# Altium PCB Inductive_measurement.PcbDoc
Units mm, origin at the board's own origin, x right, y up, seen from the top; angles counter-clockwise.
Board outline 60 x 140 mm, 4 copper layers (Top Layer, GND, Supply, Bottom Layer), stack 0.778 mm thick; 140 components, 66 nets, 478 pads, 62 vias.
Unrouted connection lines stored in the file: 122.
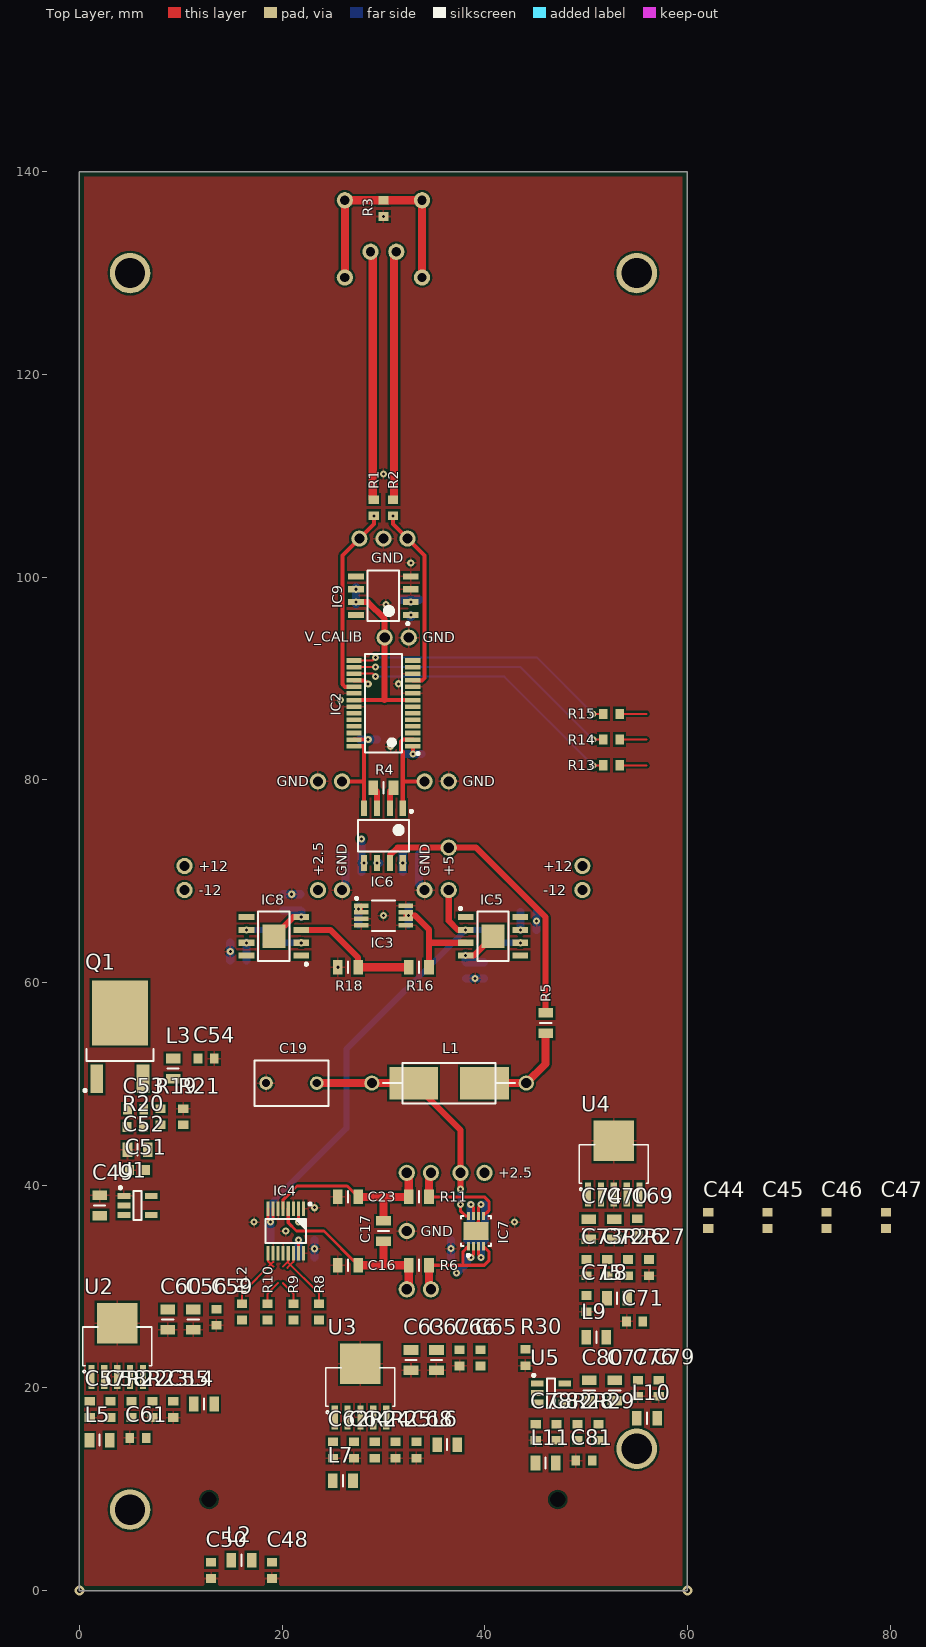
[diagram p0: Top Layer view]
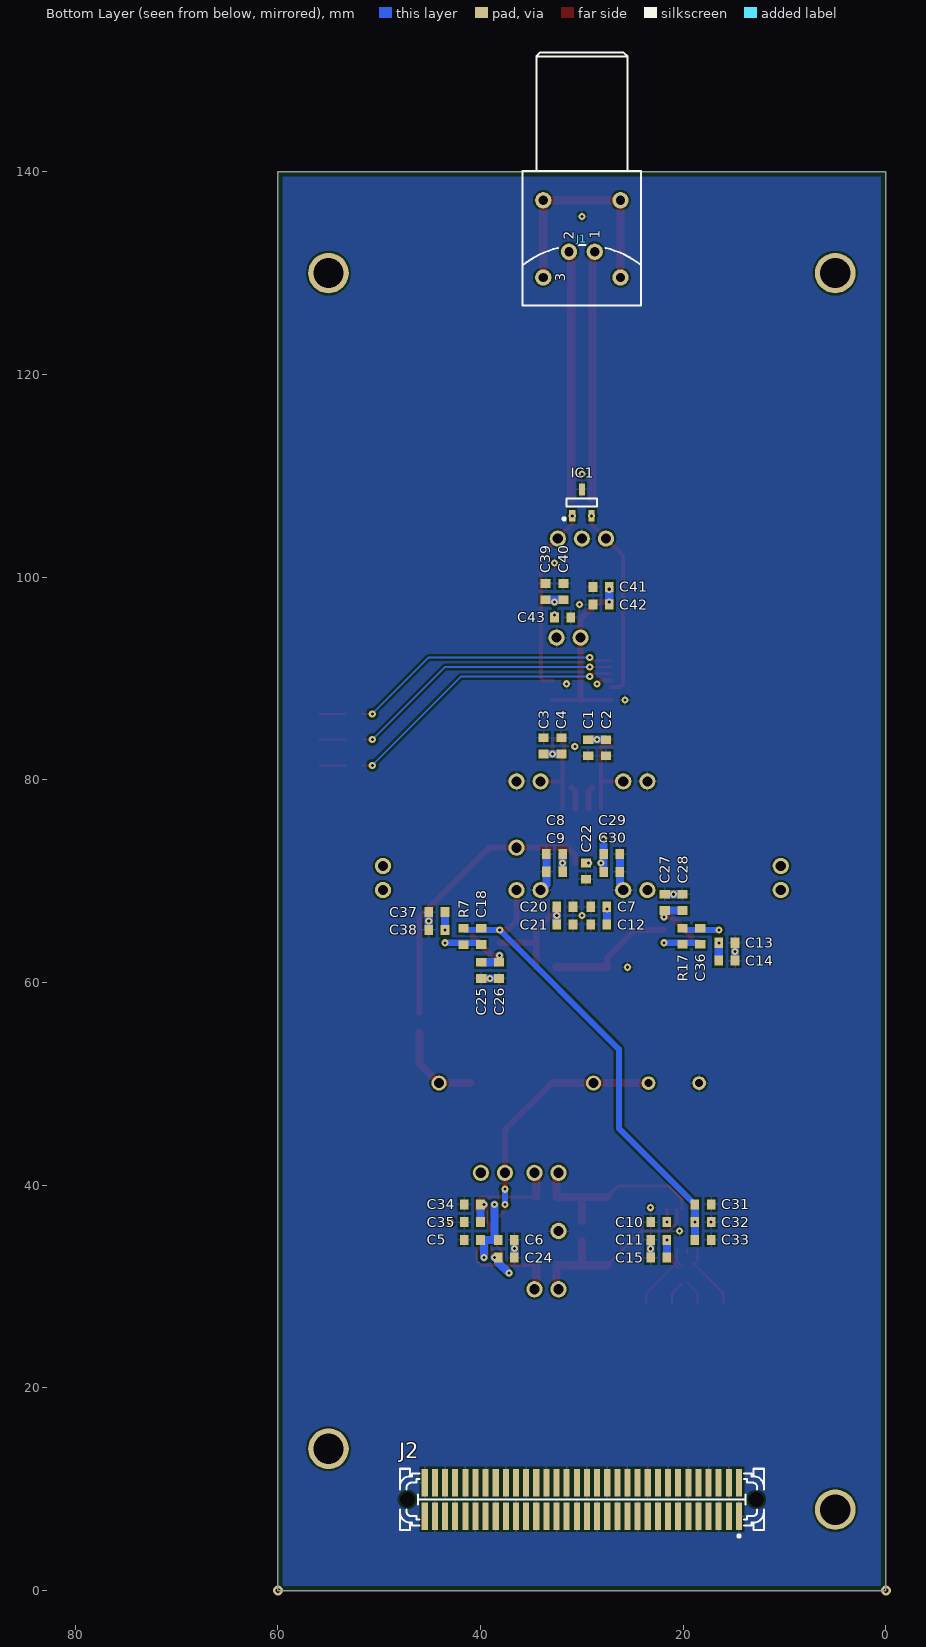
[diagram p1: Bottom Layer view, seen from below]
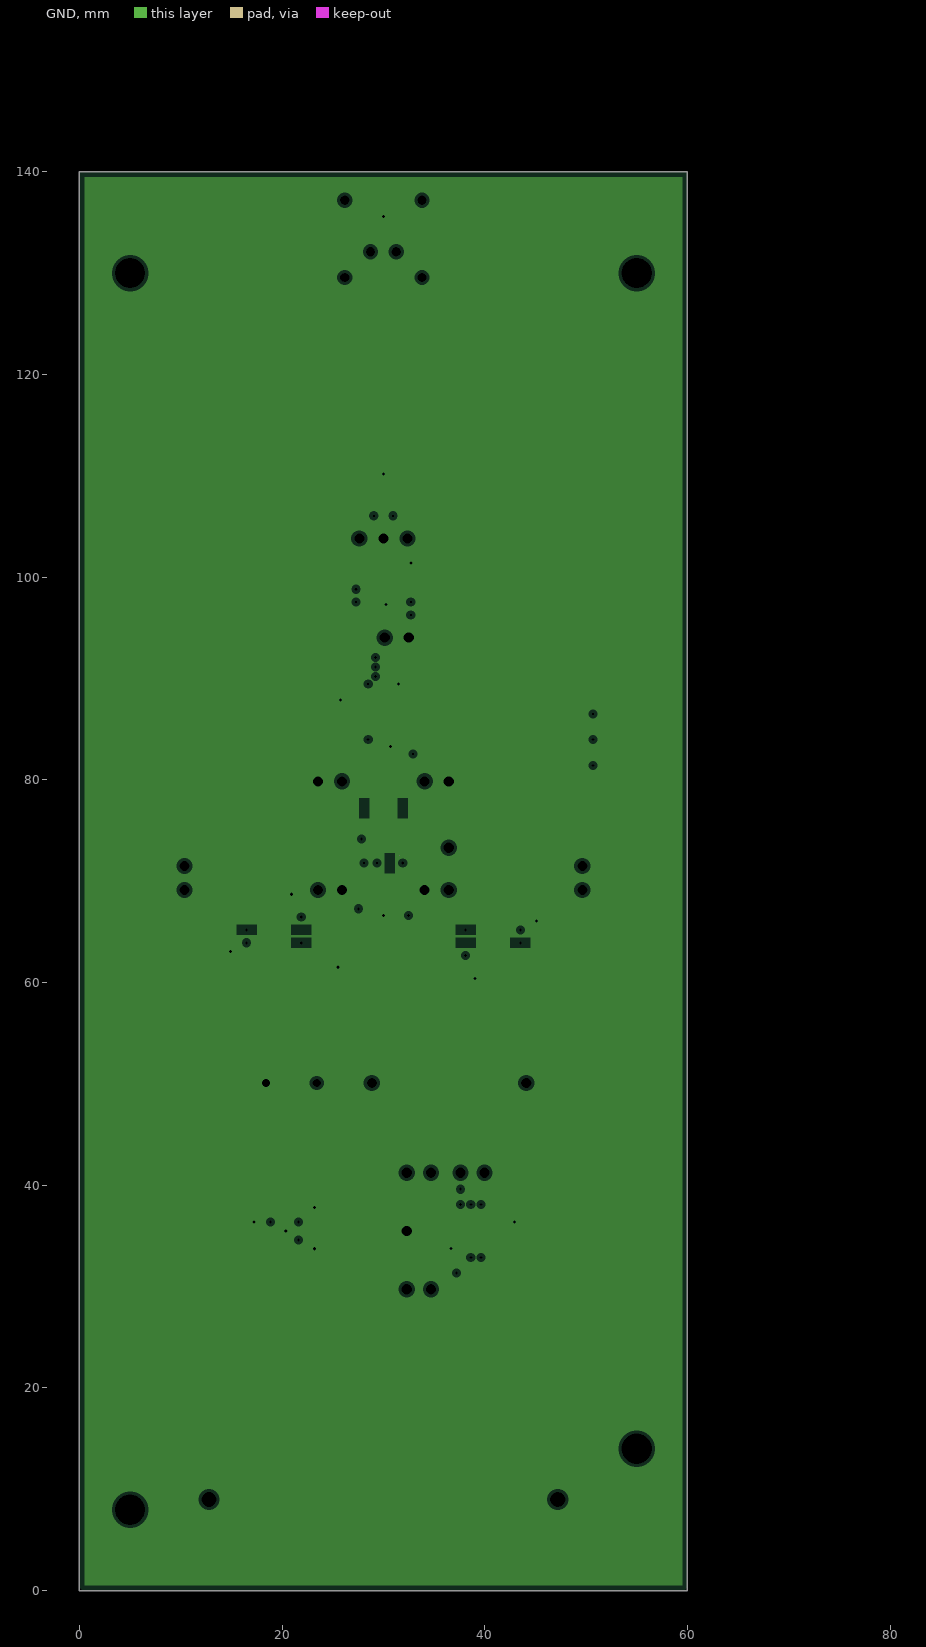
[diagram p2: GND, clearances drawn from the general rule]
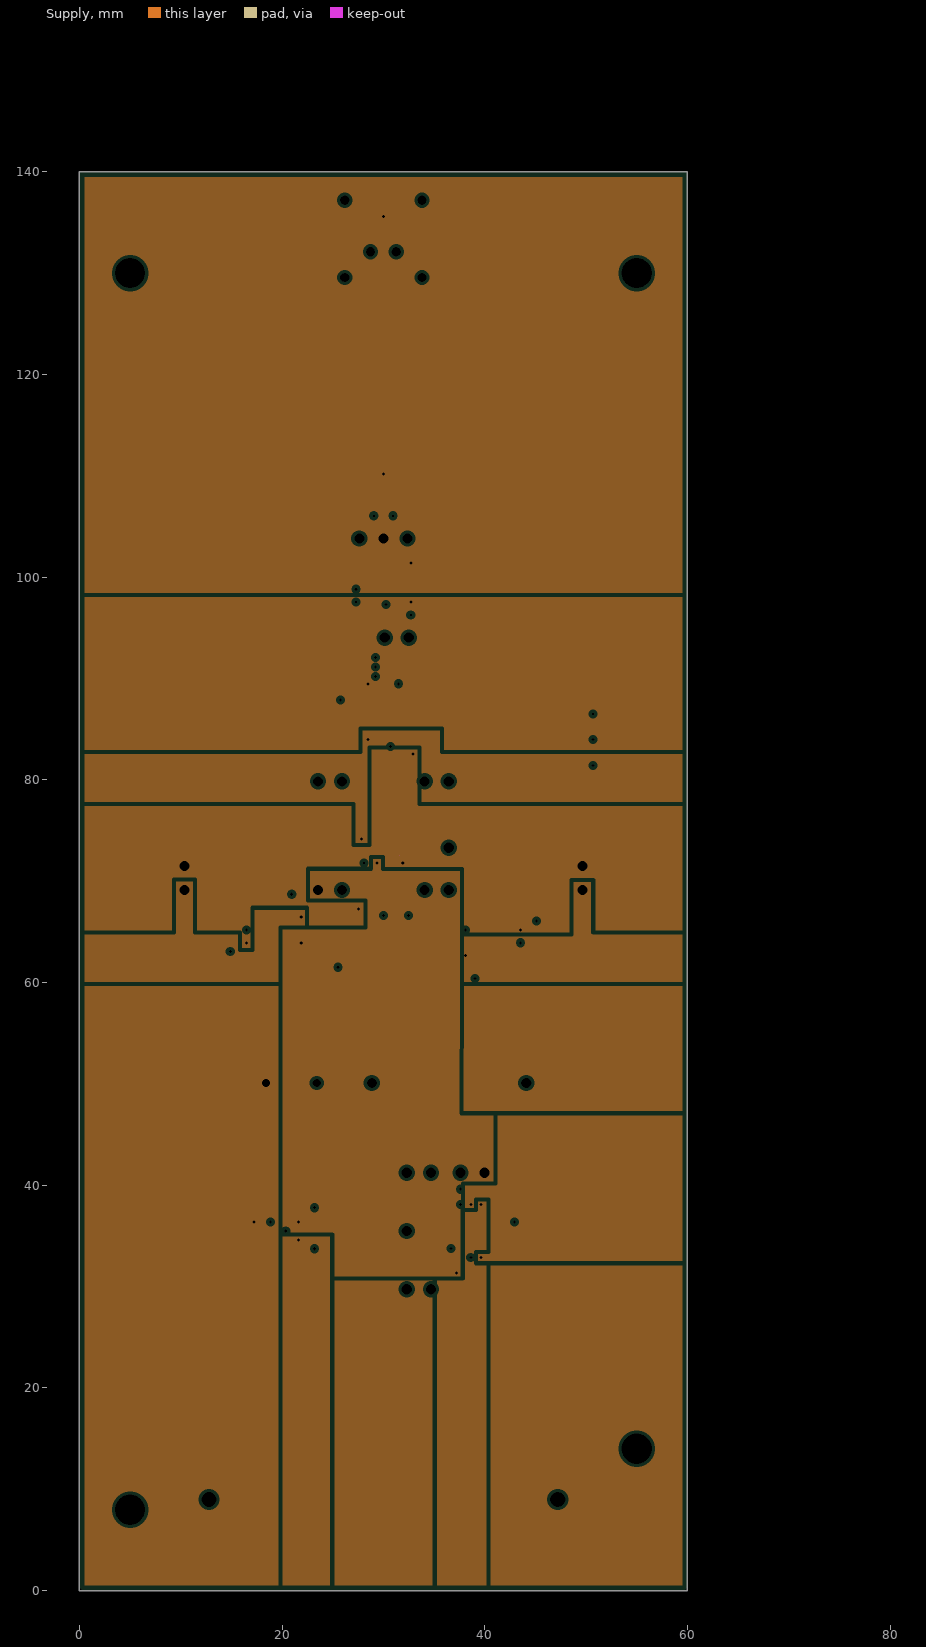
[diagram p3: Supply, clearances drawn from the general rule]

## Layer stack, top to bottom
Top Solder: solder mask 0.0102, Solder Resist, Dk 3.5
Top Layer: signal copper 0.0356
Dielectric 1: core 0.254, FR-4, Dk 4.2
GND: plane copper 0.036, net GND
Dielectric 2: prepreg 0.127, Dk 4.2
Supply: plane copper 0.036, net (Multiple Nets)
Dielectric 3: core 0.254, Dk 4.2
Bottom Layer: signal copper 0.0356
Bottom Solder: solder mask 0.0102, Solder Resist, Dk 3.5

## Board outline
0,0 60,0 60,140 0,140
cut-out: 31.6,72.55

## Design rules (kind name [scope] priority, off if disabled: settings)
Clearance [All] p1: gap=0.2 ignorepadtopadclearanceinfootprint=FALSE except(0: Arc-Hole Track-Hole SMDPad-Hole THPad-Hole Via-Hole Fill-Hole Poly-Hole Region-Hole Text-Hole; 0.25: Arc-Via Track-Via SMDPad-Via THPad-Via Via-Via Via-Fill Via-Poly Via-Region Via-Text)
HoleToHoleClearance [All] p1: gap=0.25 allowstackedmicrovias=TRUE
MinimumSolderMaskSliver [All] p1: minsoldermaskwidth=0.2
PlaneClearance [All] p1: clearance=0.3
PlaneConnect [All] p1: planeconnectstyle=Direct reliefexpansion=0.508 reliefentries=4 reliefconductorwidth=0.254 reliefairgap=0.254
PolygonConnect [All] p1: connectstyle=Relief reliefconductorwidth=0.2 reliefentries=4 polygonreliefangle="90 Angle" airgapwidth=0.2
RoutingVias [All] p1: holewidth=0.3 width=0.7 viastyle="Through Hole" minholewidth=0.3 minwidth=0.7 maxholewidth=1 maxwidth=1.6
SilkToSilkClearance [All] p1: silktosilkclearance=0.2
SilkToSolderMaskClearance [IsPad] p1: minsilkscreentomaskgap=0.2 clearancetoexposedcopper=TRUE
SolderMaskExpansion [All] p1: expansion=0.102
Width [All] p1: maxlimit=0.9 minlimit=0.2 preferedwidth=0.2
24 further rules are at their usual default settings.

## Classes and differential pairs
component class Int_LDOs: C48 C49 C50 C51 C52 C53 C54 C55 C56 C57 C58 C59 C60 C61 C62 C63 C64 C65 C66 C67 C68 C69 C70 C71 C72 C73 C74 C75 C76 C77 C78 C79 C80 C81 C82 L2 L3 L4 L5 L6 L7 L8 L9 L10 L11 Q1 R19 R20 R21 R22 R23 R24 R25 R26 R27 R28 R29 R30 U1 U2 U3 U4 U5
component class Inductive_measurement: C1 C2 C3 C4 C5 C6 C7 C8 C9 C10 C11 C12 C13 C14 C15 C16 C17 C18 C19 C20 C21 C22 C23 C24 C25 C26 C27 C28 C29 C30 C31 C32 C33 C34 C35 C36 C37 C38 C39 C40 C41 C42 C43 C44 C45 C46 C47 IC1 IC2 IC3 IC4 IC5 IC6 IC7 IC8 IC9 J1 J2 L1 R1 R2 R3 R4 R5 R6 R7 R8 R9 R10 R11 R12 R13 R14 R15 R16 R17 R18 R20

## Components (designator, comment, footprint, x,y, rotation, side; value= is the part's Value field where it differs from the comment)
C1 "100n" 0603 29.375,83.17 r90 bottom
C2 "10u" 0603 27.625,83.17 r90 bottom
C3 "100n" 0603 33.775,83.345 r270 bottom
C4 "10u" 0603 32.025,83.345 r270 bottom
C5 "100n" 0603 40.808,34.605 r180 bottom
C6 "10u" 0603 37.457,34.605 r180 bottom
C7 "100n" 0603 28.33,67.48 r0 bottom
C8 "100n" 0603 32.705,72.675 r180 bottom
C9 "10u" 0603 32.705,70.925 r0 bottom
C10 "100n" 0603 22.411,36.355 r180 bottom
C11 "100n" 0603 22.411,34.605 r0 bottom
C12 "10u" 0603 28.33,65.731 r0 bottom
C13 "100n" 0603 15.691,63.92 r0 bottom
C14 "10u" 0603 15.691,62.17 r180 bottom
C15 "10u" 0603 22.411,32.855 r0 bottom
C16 "3.9n" 0805 26.5,32.105 r180 top
C17 "3.9n" 0805 30,35.48 r270 top
C18 "=Value" 0603 39.925,64.55 r270 bottom
C19 "1u" CAPR500-450X730X950 20.925,50.075 r0 top
C20 "100n" 0603 31.68,67.48 r0 bottom
C21 "=Value" 0603 31.68,65.731 r0 bottom
C22 "100n" 0603 29.605,70.99 r90 bottom
C23 "3.9n" 0805 26.5,38.855 r0 top
C24 "100n" 0603 37.457,32.855 r0 bottom
C25 "100n" 0603 39.925,61.2 r90 bottom
C26 "10u" 0603 38.175,61.2 r90 bottom
C27 "100n" 0603 21.826,67.91 r270 bottom
C28 "10u" 0603 20.076,67.91 r270 bottom
C29 "100n" 0603 27.055,72.665 r0 bottom
C30 "10u" 0603 27.055,70.915 r180 bottom
C31 "22u" 0603 18.048,38.105 r0 bottom
C32 "22u" 0603 18.048,36.355 r0 bottom
C33 "22u" 0603 18.048,34.605 r0 bottom
C34 "100n" 0603 40.808,38.105 r180 bottom
C35 "10u" 0603 40.808,36.355 r0 bottom
C36 "=Value" 0603 18.326,64.56 r270 bottom
C37 "100n" 0603 44.31,66.94 r0 bottom
C38 "10u" 0603 44.31,65.19 r180 bottom
C39 "100n" 0603 33.574,98.57 r90 bottom
C40 "10u" 0603 31.824,98.57 r90 bottom
C41 "100n" 0603 28.1,99.04 r180 bottom
C42 "10u" 0603 28.1,97.29 r180 bottom
C43 "100n" 0603 31.9,96.02 r0 bottom
C44 "100n" 0603 62.054,36.528 r90 top
C45 "100n" 0603 67.905,36.528 r90 top
C46 "100n" 0603 73.73,36.528 r90 top
C47 "100n" 0603 79.58,36.528 r90 top
C48 "100n" 0603 19,2 r90 top
C49 "2u2" 0805 2,38 r270 top
C50 "100n" 0603 13,2 r90 top
C51 "100n" 0603 5.75,41.5 r0 top
C52 "2u2" 0805 5.75,43.5 r0 top
C53 "100n" 0603 5.55,47.5 r0 top
C54 "100n" 0603 12.5,52.5 r180 top
C55 "100n" 0603 9.261,17.88 r90 top
C56 "2u2" 0805 11.23,26.742 r90 top
C57 "100n" 0603 1.029,17.88 r90 top
C58 "10n" 0603 3.087,17.88 r90 top
C59 "100n" 0603 13.513,26.967 r90 top
C60 "2u2" 0805 8.722,26.742 r90 top
C61 "100n" 0603 5.787,15.072 r0 top
C62 "100n" 0603 25.029,13.88 r90 top
C63 "2u2" 0805 32.722,22.742 r90 top
C64 "100n" 0603 27.087,13.88 r90 top
C65 "10n" 0603 39.571,22.967 r90 top
C66 "100n" 0603 37.513,22.967 r90 top
C67 "2u2" 0805 35.23,22.742 r90 top
C68 "100n" 0603 33.261,13.88 r90 top
C69 "100n" 0603 55.045,35.88 r90 top
C70 "2u2" 0805 52.762,35.655 r90 top
C71 "100n" 0603 54.787,26.556 r0 top
C72 "10n" 0603 52.087,31.872 r90 top
C73 "100n" 0603 50.029,31.872 r90 top
C74 "2u2" 0805 50.254,35.655 r90 top
C75 "100n" 0603 50.029,28.314 r90 top
C76 "100n" 0603 55.103,19.967 r90 top
C77 "2u2" 0805 52.82,19.742 r90 top
C78 "100n" 0603 45.029,15.634 r90 top
C79 "100n" 0603 57.161,19.967 r90 top
C80 "2u2" 0805 50.312,19.742 r90 top
C81 "100n" 0603 49.787,12.826 r0 top
C82 "100n" 0603 47.087,15.634 r90 top
IC1 "PESD12VL2BT" SOT95P280X115-3N 30,107.35 r90 bottom
IC2 "ADG1207" SOP65P640X120-28N 30,87.545 r180 top
IC3 "LTC6655B-5" SOP65P488X110-8N 30,66.605 r0 top
IC4 "LTC2379-18" SOP50P490X110-16N 20.361,35.48 r270 top
IC5 "ADA4898-1" SOIC127P600X175-9N-S229 40.81,64.555 r0 top
IC6 "AD8429" SOIC127P600X175-8N 30,74.49 r270 top
IC7 "LT6350" SON50P300X300X80-9N-R175X248 39.132,35.48 r90 top
IC8 "ADA4898-1" SOIC127P600X175-9N-S229 19.191,64.555 r180 top
IC9 "MAX6126" SOIC127P600X175-8N 30,98.165 r180 top
J1 "=Family" LEMO_EPG.0B.302.HLN 30,132.1 r90 bottom
J2 "PCI_PMC" TYCO_120527-1 12.8,9 r0 bottom locked
L1 "100u" INDAD1524-920X400 36.475,50.075 r180 top
L2 "BLM211k" 0805 16,3 r180 top value=1k
L3 "BLM211k" 0805 9.25,51.5 r90 top value=1k
L4 "BLM211k" 0805 12.294,18.405 r0 top value=1k
L5 "BLM211k" 0805 2.004,14.847 r0 top value=1k
L6 "BLM211k" 0805 36.294,14.405 r0 top value=1k
L7 "BLM211k" 0805 26.004,10.847 r0 top value=1k
L8 "BLM211k" 0805 53.062,28.839 r0 top value=1k
L9 "BLM211k" 0805 51,25 r0 top value=1k
L10 "BLM211k" 0805 56,17 r0 top value=1k
L11 "BLM211k" 0805 46.004,12.601 r0 top value=1k
Q1 "MJD2955" DPAK 4,54.65 r90 top
R1 "=Value" 0603 29.05,106.85 r90 top
R2 "=Value" 0603 30.95,106.85 r90 top
R3 "1M" 0603 30,136.38 r90 top
R4 "DNP" 0805 30,79.215 r0 top
R5 "100" 0805 46.01,56 r270 top
R6 "22" 0805 33.5,32.105 r180 top
R7 "22" 0603 41.668,64.543 r90 bottom
R8 "22" 0603 23.65,27.5 r270 top
R9 "22" 0603 21.11,27.5 r270 top
R10 "22" 0603 18.57,27.5 r270 top
R11 "22" 0805 33.5,38.855 r180 top
R12 "22" 0603 16.03,27.5 r270 top
R13 "22" 0603 52.5,81.43 r180 top
R14 "22" 0603 52.5,83.97 r180 top
R15 "22" 0603 52.5,86.51 r180 top
R16 "1k" 0805 33.501,61.505 r0 top
R17 "22" 0603 20.076,64.56 r270 bottom
R18 "1k" 0805 26.501,61.505 r0 top
R19 "18k" 0603 8,46.75 r90 top
R20 "47k" 0603 5.5,45.75 r180 top
R21 "1k6" 0603 10.25,46.75 r270 top
R22 "16k" 0603 5.145,17.88 r90 top
R23 "1k5" 0603 7.203,17.88 r90 top
R24 "4k7" 0603 29.145,13.88 r90 top
R25 "1k3" 0603 31.203,13.88 r90 top
R26 "2k" 0603 54.145,31.872 r90 top
R27 "1k3" 0603 56.203,31.872 r90 top
R28 "8k2" 0603 49.145,15.634 r90 top
R29 "16k" 0603 51.203,15.634 r90 top
R30 "12k" 0603 44,23 r90 top
U1 "ADP7182ADJ" SOT23-5 5.75,38 r0 top value=ADJ
U2 "REG104GAADJ" SOT223_6-127 3.734,24.104 r0 top value=ADJ
U3 "REG104GAADJ" SOT223_6-127 27.734,20.104 r0 top value=ADJ
U4 "REG104GAADJ" SOT223_6-127 52.734,42.104 r0 top value=ADJ
U5 "ADP7182ADJ" SOT23-5 46.529,19.492 r0 top value=ADJ

## Footprints (in the part's own frame and the unit in brackets; to place one, negate y for a bottom-side part, rotate by r counter-clockwise, add the part's x,y. Pads: shape width x height; smd on the part's side, far side on the other; paste and mask are expansions set on the pad)
0603 [mm] "Chip Resistor, EIA 0603, Metric 1608, Body 1.6x0.8mm, IPC Medium Density"
  rect 0.85x1 smd: 1(-0.8,0) 2(0.8,0)
  body extent -0.87,-0.47 0.88,0.48, height 0.6
0805 [mm] "Chip Resistor, EIA 0805, Metric 2012, Body 2.0x1.25mm, IPC Medium Density"
  rect 0.95x1.45 smd: 1(-1,0) 2(1,0)
  silkscreen extent 0,-0.55 0,0.55, body extent -1.1,-0.67 1.1,0.68, height 0.5
CAPR500-450X730X950 [mm] "Capacitor Radial, Pin spacing 5.0mm - Body With 4.5mm X Body Length 7.3mm X Body Height 9.5mm"
  round 1.35 hole 0.8: 1(-2.5,0) 2(2.5,0)
  silkscreen extent -3.65,-2.25 3.65,2.25, body extent -3.65,-2.25 3.65,2.25, height 9.5
DPAK [mm] "TO-252AA DPAK TO, 2.28mm pitch; 2 pin,9.90mm L X 6.56mm W X 2.38mm H body, IPC Medium Density"
  rect 2.8x1.25 smd: 1(-4.15,2.28) 2(-4.15,-2.28)
  rect 6.4x5.55 smd: 3(2.35,0)
  silkscreen extent -5.42,-3.3 -1.2,3.57, body extent -4.99,-3.27 4.95,3.27, height 2.28
INDAD1524-920X400 [mm] "Inductor, Axial Diameter, Pad spacing 15.24 mm - Body Lengh 9.2mm X Body Diameter 4mm"
  round 1.5 hole 1: 1(-7.62,0) 2(7.62,0)
  rect 4.8x3.2 smd: 1(-3.5,0) 2(3.5,0)
  silkscreen extent -6.5,-2 6.5,2, body extent -8.02,-2 8.02,2, height 4
LEMO_EPG.0B.302.HLN [mm] "Elbow Receptacle (90°) With 2 Female Contacts and Key (G) For PCB"
  round 1.6 hole 0.9: 1(0,-1.27) 2(0,1.27) 3(-2.54,-3.81) 3(-2.54,3.81) 3(5.08,-3.81) 3(5.08,3.81)
  silkscreen extent -5.32,-5.85 19.68,5.85, body extent -5.32,-5.85 19.68,5.85, height 12.7
SOIC127P600X175-8N [mm] "SOIC 8, Pitch 1.27mm - Body 4x5mm, IPC Medium Density"
  rect 1.55x0.6 smd: 1(-2.7,1.905) 2(-2.7,0.635) 3(-2.7,-0.635) 4(-2.7,-1.905) 5(2.7,-1.905) 6(2.7,-0.635) 7(2.7,0.635) 8(2.7,1.905)
  silkscreen extent -2.52,-2.5 1.55,2.88, body extent -3.1,-2.5 3.1,2.5, height 1.75
SOIC127P600X175-9N-S229 [mm] "SOIC 8, 1.27mm Pitch; 8 pin, 3.90mm W X 4.90mm L X 1.75mm H body, (w/thermal tab 2.29mm X 2.29mm), IPC Medium Density"
  rect 1.55x0.6 smd: 1(-2.7,1.905) 2(-2.7,0.635) 3(-2.7,-0.635) 4(-2.7,-1.905) 5(2.7,-1.905) 6(2.7,-0.635) 7(2.7,0.635) 8(2.7,1.905)
  rect 2.29x2.29 smd: 9(0,0)
  silkscreen extent -3.32,-2.45 1.55,2.87, body extent -3.1,-2.5 3.1,2.5, height 1.75
SON50P300X300X80-9N-R175X248 [mm] "SON, (DFN) 0.50mm,pitch; 8 pin,3.00mm W X 3.00mm L X 0.80mm H body (w/thermal tab 1.75 X2.48mm), IPC Medium Density"
  rect 0.8x0.3 smd: 1(-1.5,0.75) 2(-1.5,0.25) 3(-1.5,-0.25) 4(-1.5,-0.75) 5(1.5,-0.75) 6(1.5,-0.25) 7(1.5,0.25) 8(1.5,0.75)
  rect 1.75x2.45 smd: 9(0,0)
  silkscreen extent -2.52,-1.5 1.5,1.5, body extent -1.55,-1.55 1.55,1.55, height 0.8
SOP50P490X110-16N [mm] "SOP, 0.50mm Pitch; 16 Pin, 3.00mm W X 4.039mm L X 1.10mm H Body, IPC Medium Density"
  rect 1.4x0.3 smd: 1(-2.2,1.75) 2(-2.2,1.25) 3(-2.2,0.75) 4(-2.2,0.25) 5(-2.2,-0.25) 6(-2.2,-0.75) 7(-2.2,-1.25) 8(-2.2,-1.75) 9(2.2,-1.75) 10(2.2,-1.25) 11(2.2,-0.75) 12(2.2,-0.25) 13(2.2,0.25) 14(2.2,0.75) 15(2.2,1.25) 16(2.2,1.75)
  silkscreen extent -2.77,-2 1.17,2.53, body extent -2.47,-2.07 2.47,2.07, height 1.1
SOP65P488X110-8N [mm] "SOP, 8-Leads, Body 3x3mm (max), Pitch 0.65mm, IPC Medium Density"
  rect 1.45x0.45 smd: 1(-2.2,0.975) 2(-2.2,0.325) 3(-2.2,-0.325) 4(-2.2,-0.975) 5(2.2,-0.975) 6(2.2,-0.325) 7(2.2,0.325) 8(2.2,0.975)
  silkscreen extent -2.77,-1.5 1.12,1.82, body extent -2.45,-1.55 2.45,1.55, height 1.1
SOP65P640X120-28N [mm] "SOP, 0.65mm Pitch; 28 Pin, 4.40mm W X 9.70mm L X 1.20mm H body, IPC Medium Density"
  rect 1.5x0.45 smd: 1(-2.9,4.225) 2(-2.9,3.575) 3(-2.9,2.925) 4(-2.9,2.275) 5(-2.9,1.625) 6(-2.9,0.975) 7(-2.9,0.325) 8(-2.9,-0.325) 9(-2.9,-0.975) 10(-2.9,-1.625) 11(-2.9,-2.275) 12(-2.9,-2.925) 13(-2.9,-3.575) 14(-2.9,-4.225) 15(2.9,-4.225) 16(2.9,-3.575) 17(2.9,-2.925) 18(2.9,-2.275) 19(2.9,-1.625) 20(2.9,-0.975) 21(2.9,-0.325) 22(2.9,0.325) 23(2.9,0.975) 24(2.9,1.625) 25(2.9,2.275) 26(2.9,2.925) 27(2.9,3.575) 28(2.9,4.225)
  silkscreen extent -3.53,-4.85 1.83,5.07, body extent -3.12,-4.9 3.12,4.9, height 1.2
SOT23-5 [mm] "SOT, 0.95mm Pitch; 5 Pin,1.55mm W X 2.90mm L X 1.45mm H body, IPC Medium Density"
  rect 1.25x0.6 smd: 1(-1.35,0.95) 2(-1.35,0) 3(-1.35,-0.95) 4(1.35,-0.95) 5(1.35,0.95)
  silkscreen extent -1.82,-1.45 0.4,1.87, body extent -1.35,-1.45 1.35,1.45, height 1.45
SOT95P280X115-3N [mm] "SOT23, 0.95mm, pitch;3 pin,1.55mm W X 2.95mm L X 1.15mm H body, IPC Medium Density"
  rect 1.15x0.6 smd: 1(-1.3,0.95) 2(-1.3,-0.95) 3(1.3,0)
  silkscreen extent -1.72,-1.5 0.4,1.88, body extent -1.4,-1.5 1.6,1.5, height 1.15
SOT223_6-127 [mil]
  rect 24x93 smd paste+0 mask+0: 1(-100,-118.5) 2(-50,-118.5) 3(0,-118.5) 4(50,-118.5) 5(100,-118.5)
  rect 157.48x157.48 smd: 6(0,90)
  silkscreen extent -134,-103 134,75, body extent -129,-143 129,143, height 71
TYCO_120527-1 [mm] "1mm Centerline, FH (IEEE 1386) Surface Mount, Stacking Board-to-Board Male Connectors"
  rect 0.6x2.7 smd: 1(1.7,1.65) 2(1.7,-1.65) 3(2.7,1.65) 4(2.7,-1.65) 5(3.7,1.65) 6(3.7,-1.65) 7(4.7,1.65) 8(4.7,-1.65) 9(5.7,1.65) 10(5.7,-1.65) 11(6.7,1.65) 12(6.7,-1.65) 13(7.7,1.65) 14(7.7,-1.65) 15(8.7,1.65) 16(8.7,-1.65) 17(9.7,1.65) 18(9.7,-1.65) 19(10.7,1.65) 20(10.7,-1.65) 21(11.7,1.65) 22(11.7,-1.65) 23(12.7,1.65) 24(12.7,-1.65) 25(13.7,1.65) 26(13.7,-1.65) 27(14.7,1.65) 28(14.7,-1.65) 29(15.7,1.65) 30(15.7,-1.65) 31(16.7,1.65) 32(16.7,-1.65) 33(17.7,1.65) 34(17.7,-1.65) 35(18.7,1.65) 36(18.7,-1.65) 37(19.7,1.65) 38(19.7,-1.65) 39(20.7,1.65) 40(20.7,-1.65) 41(21.7,1.65) 42(21.7,-1.65) 43(22.7,1.65) 44(22.7,-1.65) 45(23.7,1.65) 46(23.7,-1.65) 47(24.7,1.65) 48(24.7,-1.65) 49(25.7,1.65) 50(25.7,-1.65) 51(26.7,1.65) 52(26.7,-1.65) 53(27.7,1.65) 54(27.7,-1.65) 55(28.7,1.65) 56(28.7,-1.65) 57(29.7,1.65) 58(29.7,-1.65) 59(30.7,1.65) 60(30.7,-1.65) 61(31.7,1.65) 62(31.7,-1.65) 63(32.7,1.65) 64(32.7,-1.65)
  round 1 hole 1.5 unplated: 65(0,0) 66(34.4,0)
  silkscreen extent -0.75,-3.03 35.15,3.72, body extent -0.75,-3.03 35.15,3.03, height 8.38

## Part data
C1 C2 C3 C4 C5 C6 C7 C8 C9 C10 C11 C12 C13 C14 C15 C16 C17 C18 C20 C21 C22 C23 C24 C25 C26 C27 C28 C29 C30 C31 C32 C33 C34 C35 C36 C37 C38 C39 C40 C41 C42 C43 C44 C45 C46 C47 C48 C49 C50 C51 C52 C53 C54 C55 C56 C57 C58 C59 C60 C61 C62 C63 C64 C65 C66 C67 C68 C69 C70 C71 C72 C73 C74 C75 C76 C77 C78 C79 C80 C81 C82: library part Capacitor
C19: library part "Capacitor 4.5mm x 7.3mm"
IC2: "8-channel multiplexer"
IC3: "Reference, 5 V"
IC4: "ADC"
IC5 IC8: "Op amp"
IC6: "1 nV/sqrt Hz Low Noise Instrumentation Amplifier"
IC7: "ADC driver"
IC9: library part MAX6126AASA41, "Reference, 4.096 V"
J1: library part "Connector 2 Female", "Connector 2 Female"
J2: "PCI Mezzanine Connector; IEEE 1386 Mezzanine board", Manufactuer="TE Connectivity", PartField=120527-1, Pkg="PMC Male (IEEE 1386)", SolderOption=2, Vendor="TE Connectivity"
L1: library part Inductor, "Inductor"
L2 L3 L4 L5 L6 L7 L8 L9 L10 L11: library part BLM21, "SMD Ferrite bead 0805", Device=BLM21, Pkg=SMD0805, Price=10, SMD Solders=2, Solder Option=RM, Vendor=Vishay
Q1: "PNP транзистор", Voltage=-60V, Device=MJD2955, Name to order=MJD29G55, Pkg=DPAK, Price=100, SMD Solders=3, Solder Option=RM, Vendor="ON Semiconductor"
R1 R2 R3 R4 R5 R6 R7 R8 R9 R10 R11 R12 R13 R14 R15 R16 R17 R18 R19 R20 R21 R22 R23 R24 R25 R26 R27 R28 R29 R30: library part Resistor
U1 U5: library part ADP7182, "Negative LDO Linear stabilizer", Device=ADP7182, Name to order=ADP7182AUJZ-R7, Pkg=SOT23-5, Price=100, SMD Solders=5, Solder Option=RM, Vendor="Analog Devoces", Vref=1V22
U2 U3 U4: library part REG104GA, "Positive LDO Linear stabilizer", Tolerance="+-2% Max", Device=REG104GA, Name to order=REG104GA-A, Pkg=SOT223-6, Price=1000, SMD Solders=6, Solder Option=RM, TC=70ppm/C, Vendor="Texas Instruments", Vref=1V295

## Free pads (board coordinates)
  round 4 hole 3: 0(5,8) 0(5,130) 0(55,14) 0(55,130)
  round 1.6 hole 1: ""(10.375,69.125) ""(10.375,71.5) ""(23.542,69.118) ""(23.542,79.85) ""(25.917,69.118) ""(25.917,79.85) ""(27.625,103.8) ""(30,103.8) ""(30.125,94.025) ""(32.305,29.734) ""(32.305,35.48) ""(32.305,41.225) ""(32.375,103.8) ""(32.5,94.025) ""(34.069,69.118) ""(34.069,79.85) ""(34.68,29.734) ""(34.68,41.225) ""(36.444,69.118) ""(36.444,73.302) ""(36.444,79.85) ""(37.597,41.225) ""(39.972,41.225) ""(49.625,69.125) ""(49.625,71.5)

## Via types
v1: diameter 0.7, hole 0.3, Top Layer to Bottom Layer, tented both sides, 31 vias
v2: diameter 0.7, hole 0.3, Top Layer to Bottom Layer, 27 vias
v3: diameter 1, hole 0.5, Top Layer to Bottom Layer, 4 vias

## Nets (pads, with @x,y where several pads share a name; then routed paths per layer and width w, separated by ;. In a path a pad name is that pad's centre, name@x,y a point inside that pad or via, vN(x,y) a via of type N, cw(c..) or ccw(c..) an arc to the next point about the centre after c; other vN are vias at no path point)
+2.5: C10.2 C22.2 C24.2 C36.2 IC4.2 IC6.6 IC7.2 IC8.2 pad.@23.542,69.118 pad.@39.972,41.225 R17.2 | length 8.7
  Top Layer w0.3: v2(21.611,36.355) IC4.2 ; v2(38.62,32.855) 38.882,33.118 IC7.2
  Bottom Layer w0.6: C36.2 18.486,63.92 v2(21.891,63.92)
  Bottom Layer w0.8: v2(29.365,71.79) C22.2@29.595,71.79 ; v1(37.208,31.337) 38.257,32.386 C24.2 v2(38.62,32.855)
+3.3: C11.1 C15.1 C75.2 IC4.15 L9.2 | length 3.1
  Top Layer w0.3: IC4.15 v2(21.611,34.605)
  Bottom Layer w0.8: C15.1 v2(21.611,34.605)
+6: C5.2 C6.1 C68.2 IC7.3 IC7.7 L7.2 | length 9.6
  Top Layer w0.3: v1(38.619,38.105) 38.882,37.842 IC7.7 ; IC7.3 39.382,33.118 v1(39.645,32.855)
  Bottom Layer w0.8: C6.1 C6.1@38.619,34.605 ; v1(38.619,38.105) C6.1@38.619,34.605 ; v1(39.645,32.855) 39.645,34.242 C5.2 C6.1@38.619,34.605
+7: C47.2 C62.2 C69.2 L6.1 L8.1
+12: C3.2 C4.2 C7.1 C8.2 C9.1 C12.1 C13.2 C14.1 C37.1 C38.2 C39.1 C40.1 C61.2 IC2.1 IC2.18 IC3.1 IC3.2 IC5.7 IC6.8 IC8.7 IC9.2 L5.2 pad.@10.375,71.5 pad.@49.625,71.5 | length 13.7
  Top Layer w0.4: IC2.18 28.119,89.82 v1@28.474,89.465 ; IC3.2 IC3.1 ; v1(32.9,82.545) IC2.1
  Bottom Layer w0.8: C14.1 16.491,63.03 v2(16.491,63.92) ; C12.1 C7.1 ; C40.1 v2@32.685,97.77 ; C9.1 v2(31.905,71.79) C8.2 ; C4.2 v1(32.9,82.545) C3.2 ; v2(32.7,97.53) 32.7,97.77 C39.1 ; v2(43.51,65.19) 43.51,66.077 C37.1
  other v1: 28.5,89.465
  other v2: 27.53,67.275
+18: C44.2 C55.2 L4.1
-2: C34.2 C35.1 C81.2 IC7.6 IC7.9 L11.2 | length 5
  Top Layer w0.3: IC7.9 39.132,36.23 39.177,36.23 39.382,36.435 IC7.6 39.382,37.842 v2(39.645,38.105)
  Bottom Layer w0.8: v2(39.645,38.105) C34.2 C35.1
-7: C46.2 C76.2 L10.1
-12: C1.2 C2.2 C25.2 C26.2 C27.2 C28.2 C29.2 C30.1 C54.2 IC2.27 IC5.4 IC5.9 IC6.5 IC8.4 IC8.9 L3.2 pad.@10.375,69.125 pad.@49.625,69.125 | length 18.5
  Top Layer w0.4: IC2.27 v1(28.5,83.97)
  Top Layer w0.6: IC8.9 21.096,66.46 v2(21.891,66.46) ; v2(38.11,62.65) 38.905,62.65 IC5.9
  Bottom Layer w0.8: C28.2 C27.2 21.891,67.045 v2(21.891,66.46) ; C2.2 v1(28.5,83.97) C1.2 ; C30.1 v1(27.855,74.175) ; v2@27.865,71.79 v2(28.095,71.79) ; v2(38.11,62.65) 38.11,62.065 C26.2 C25.2
-18: C45.2 C48.2 L2.1
ADC_BUSY: J2.6 R10.2
ADC_CNV: J2.2 R12.2
ADC_SCK: J2.10 R9.2
ADC_SDO: J2.14 R8.2
GND: C1.1 C2.1 C3.1 C4.1 C5.1 C6.2 C7.2 C8.1 C9.2 C10.1 C11.2 C12.2 C13.1 C14.2 C15.2 C16.2 C19.1 C20.1 C21.1 C22.1 C23.1 C24.1 C25.1 C26.1 C27.1 C28.1 C29.1 C30.2 C31.1 C32.1 C33.1 C34.1 C35.2 C37.2 C38.1 C39.2 C40.2 C41.1 C42.1 C43.1 C44.1 C45.1 C46.1 C47.1 C48.1 C49.1 C50.1 C51.1 C52.1 C54.1 C55.1 C56.1 C57.1 C59.1 C60.1 C61.1 C62.1 C63.1 C64.1 C66.1 C67.1 C68.1 C69.1 C70.1 C71.1 C73.1 C74.1 C75.1 C76.1 C77.1 C78.1 C79.1 C80.1 C81.1 IC1.3 IC2.9 IC2.10 IC2.12 IC2.20 IC2.22 IC3.3 IC3.4 IC3.5 IC3.8 IC4.1 IC4.3 IC4.6 IC4.10 IC4.12 IC4.16 IC9.3 IC9.4 J2.1 J2.4 J2.5 J2.8 J2.9 J2.12 J2.13 J2.16 J2.17 J2.20 J2.21 J2.24 J2.25 J2.28 J2.29 J2.32 J2.33 J2.36 J2.37 J2.40 J2.41 J2.44 J2.45 J2.48 J2.49 J2.52 J2.53 J2.56 J2.57 J2.60 J2.61 J2.64 pad.@23.542,79.85 pad.@25.917,69.118 pad.@30,103.8 pad.@32.5,94.025 pad.@32.305,35.48 pad.@34.069,69.118 pad.@36.444,79.85 R3.1 R18.1 R21.1 R23.1 R25.1 R27.1 R30.1 U1.1 U2.3 U2.6 U3.3 U3.6 U4.3 U4.6 | length 18
  Bottom Layer w0.8: C14.2 C13.1 ; C28.1 C27.1 ; C15.2 C11.2 ; pad.@25.917,69.118 26.255,69.456 C30.2 C29.1 ; C8.1 33.505,69.682 pad.@34.069,69.118 ; C24.1 C6.2 ; C26.1 C25.1 ; C38.1 C37.2
  other v1: 23.211,33.73 36.657,33.75 20.361,35.48 42.946,36.355 23.211,37.78 39.05,60.4 14.891,63.045 45.11,66.065 30,66.6 20.951,68.71 30.7,83.275 25.75,87.87 31.5,89.475 30.239,97.29 32.7,101.409 30,110.175
  other v2: 17.248,36.355 25.501,61.505 30,135.58
IN+: IC1.2 IC2.19 pad.@27.625,103.8 R1.1 | length 19.2
  Top Layer w0.4: IC2.19 26.209,89.17 25.95,89.429 25.95,102.125 27.625,103.8 29.05,105.225 v2(29.05,106.05)
IN-: IC1.1 IC2.11 pad.@32.375,103.8 R2.1 | length 18.5
  Top Layer w0.4: v2(30.95,106.05) 30.95,105.225 34.05,102.125 34.05,91.379 34.05,90.861 34.05,90.05 33.82,89.82 IC2.11
MUX_A0: J2.30 R13.1 | length 2.7
  Top Layer w0.2: R13.1 55.96,81.43
MUX_A1: J2.26 R14.1 | length 2.7
  Top Layer w0.2: R14.1 55.96,83.97
MUX_A2: J2.22 R15.1 | length 2.7
  Top Layer w0.2: R15.1 55.96,86.51
NetC16_1: C16.1 C17.2 IC4.4 pad.@32.305,29.734 R6.2 | length 19.8
  Top Layer w0.3: IC4.4 20.611,36.291 21.427,35.475 24.13,35.475 C16.1
  Top Layer w0.8: C16.1 30,32.105 ; C17.2 30,32.105 ; pad.@32.322,29.733 32.502,29.913 R6.2@32.502,32.103 ; R6.2 30,32.105
NetC17_1: C17.1 C23.2 IC4.5 pad.@32.305,41.225 R11.2 | length 19
  Top Layer w0.3: IC4.5 20.111,38.566 21.475,39.93 21.525,39.93 26.425,39.93 C23.2
  Top Layer w0.8: C23.2 R11.2 32.5,41.045 pad.@32.32,41.225 ; C17.1 30,38.73
NetC18_2: C18.2 IC5.6 R7.1 | length 3.7
  Bottom Layer w0.6: C18.2 40.095,63.92 v2(43.51,63.92)
NetC19_2: C19.2 IC7.8 L1.2 pad.@37.597,41.225 | length 25.1
  Top Layer w0.3: v1(37.594,38.105) 37.594,37.481 38.095,36.98 IC7.8
  Top Layer w0.6: L1.2@32.975,50.075 37.597,45.453 v1(37.597,39.607)
  Top Layer w0.8: C19.2 28.855,50.075 L1.2@32.975,50.075
  Bottom Layer w0.3: v1(37.594,38.105) v1@37.597,38.108
  Bottom Layer w0.6: v1@37.597,38.108 v1(37.597,39.607)
NetC20_2: C20.2 C21.2 IC3.6 IC3.7 IC5.3 R16.2 | length 12.3
  Top Layer w0.4: IC3.6 IC3.7
  Top Layer w0.6: v2(32.48,66.605) 33.12,66.605 34.5,65.225 34.5,63.92 ; R16.2 34.5,63.92 ; IC5.3 34.5,63.92
  Bottom Layer w0.8: C21.2 v2(32.48,66.605) C20.2
NetC36_1: C36.1 IC8.6 R17.1 | length 3.7
  Bottom Layer w0.6: v2(16.491,65.19) 19.906,65.19 R17.1
NetC43_2: C43.2 IC9.1 | length 0.2
  Bottom Layer w0.8: C43.2 v2(32.7,96.26)
NetC49_2: C49.2 C50.2 L2.2 Q1.3 U1.2 U1.3
NetC51_2: C51.2 C52.2 Q1.1 U1.5
NetC53_1: C53.1 R20.2
NetC53_2: C53.2 L3.1 Q1.2 R19.2
NetC56_2: C56.2 C57.2 L4.2 U2.1 U2.5
NetC58_1: C58.1 R22.1 R23.2 U2.4
NetC58_2: C58.2 C59.2 C60.2 L5.1 R22.2 U2.2
NetC63_2: C63.2 C64.2 L6.2 U3.1 U3.5
NetC65_1: C65.1 R24.1 R25.2 U3.4
NetC65_2: C65.2 C66.2 C67.2 L7.1 R24.2 U3.2
NetC70_2: C70.2 C71.2 L8.2 U4.1 U4.5
NetC72_1: C72.1 R26.1 R27.2 U4.4
NetC72_2: C72.2 C73.2 C74.2 L9.1 R26.2 U4.2
NetC77_2: C77.2 C78.2 L10.2 U5.2 U5.3
NetC79_2: C79.2 C80.2 C82.2 L11.1 R28.2 U5.5
NetC82_1: C82.1 R29.2
NetIC2_2: IC2.2 IC6.1 pad.@34.069,79.85 | length 10.1
  Top Layer w0.4: IC6.1 31.905,79.85 ; IC2.2 31.925,83.97 31.75,83.795 31.75,82.929 31.905,82.774 31.905,79.85 ; pad.@34.069,79.85 31.905,79.85
NetIC2_15: IC2.15 R15.2 | length 27
  Top Layer w0.2: IC2.15 28.92,91.77 v1(29.225,92.075) ; v1(50.68,86.51) R15.2
  Bottom Layer w0.2: v1(29.225,92.075) 45.115,92.075 v1(50.68,86.51)
NetIC2_16: IC2.16 R14.2 | length 27.6
  Top Layer w0.2: IC2.16 29.225,91.12 v1(29.225,91.125) ; v1(50.68,83.97) R14.2
  Bottom Layer w0.2: v1(29.225,91.125) 43.525,91.125 v1(50.68,83.97)
NetIC2_17: IC2.17 R13.2 | length 28.4
  Top Layer w0.2: IC2.17 28.961,90.47 29.225,90.206 v1(29.225,90.175) ; v1(50.68,81.43) R13.2
  Bottom Layer w0.2: v1(29.225,90.175) 41.935,90.175 v1(50.68,81.43)
NetIC2_28: IC2.28 IC6.4 pad.@25.917,79.85 | length 9.3
  Top Layer w0.4: pad.@25.917,79.85 28.095,79.85 ; IC2.28 28.019,83.32 28.095,83.244 28.095,79.85 ; IC6.4 28.095,79.85
NetIC4_9: IC4.9 R12.1 | length 7.4
  Top Layer w0.2: R12.1 16.03,29.32 19.15,32.44 ; IC4.9@18.611,33.725 IC4.9 18.611,32.506 19.15,31.966
NetIC4_11: IC4.11 R10.1 | length 2.9
  Top Layer w0.2: R10.1 18.57,29.32 19.611,30.361 ; IC4.11 IC4.11@19.611,33.725
NetIC4_13: IC4.13 R9.1 | length 4.5
  Top Layer w0.2: 20.075,30.355 21.11,29.32 R9.1 ; 20.075,31.97 20.611,32.506 IC4.13 IC4.13@20.611,33.725
NetIC4_14: IC4.14 R8.1 | length 7.1
  Top Layer w0.2: 20.525,31.855 21.111,32.44 IC4.14 ; 20.525,32.445 23.65,29.32 R8.1
NetIC6_2: IC6.2 R4.2 | length 2.2
  Top Layer w0.6: IC6.2 30.635,78.85 R4.2
NetIC6_3: IC6.3 R4.1 | length 2.2
  Top Layer w0.6: R4.1 29.365,78.85 IC6.3
NetIC6_7: IC6.7 pad.@36.444,73.302 R5.1 | length 28.7
  Top Layer w0.6: IC6.7 30.635,72.535 31.402,73.302 39.146,73.302 46.01,66.438 R5.1
NetIC7_1: IC7.1 IC7.4 pad.@34.68,29.734 R6.1 | length 12.3
  Top Layer w0.3: R6.1@34.5,32.103 34.502,32.103 37.868,32.103 37.87,32.105 ; IC7.1 37.87,33.468 37.87,32.105 ; IC7.4 40.395,33.467 40.395,32.544 39.956,32.105 37.87,32.105
  Top Layer w0.8: R6.1@34.502,32.103 34.502,29.913 pad.@34.682,29.733
NetIC7_5: IC7.5 pad.@34.68,41.225 R11.1 | length 10.2
  Top Layer w0.3: R11.1 39.956,38.855 40.395,38.416 40.395,37.493 IC7.5
  Top Layer w0.8: R11.1 34.5,41.045 pad.@34.68,41.225
NetIC8_3: IC8.3 R16.1 R18.2 | length 12.7
  Top Layer w0.6: IC8.3@21.892,65.19 24.761,65.19 27.501,62.45 R18.2
  Top Layer w0.8: R18.2 R16.1
NetJ1_1: J1.1 R1.2 | length 24.6
  Top Layer w0.8: J1.1 28.95,131.88 28.95,107.75 R1.2
NetJ1_2: J1.2 R2.2 | length 24.6
  Top Layer w0.8: R2.2 31.05,107.75 31.05,131.88 J1.2
NetJ1_3: J1.3 R3.2 | length 22.9
  Top Layer w0.8: J1.3@26.19,129.56 26.19,137.18 R3.2 33.81,137.18 J1.3@33.81,129.56
NetL1_1: L1.1 R5.2 | length 8.8
  Top Layer w0.8: L1.1@40.975,50.075 44.095,50.075 46.01,51.99 R5.2
NetR19_1: R19.1 R20.1 R21.2 U1.4
NetR28_1: R28.1 R29.1 R30.2 U5.4
REF5: C18.1 C31.2 C32.2 C33.2 IC4.7 IC4.8 IC5.2 pad.@36.444,69.118 R7.2 | length 50.1
  Top Layer w0.3: IC4.8 18.611,36.593 v2(18.848,36.355) 19.111,36.618 IC4.7
  Top Layer w0.6: pad.@36.444,69.118 36.444,66.092 37.353,65.183 v2(38.103,65.183) IC5.2
  Bottom Layer w0.6: C31.2 26.35,45.607 26.35,53.43 v2(38.103,65.183) 41.508,65.183 R7.2
  Bottom Layer w0.8: C33.2 v2(18.848,36.355) C31.2
V_CALIB: C41.2 C42.2 IC2.8 IC2.21 IC9.6 IC9.7 pad.@30.125,94.025 | length 19
  Top Layer w0.4: IC2.21 30.125,87.87 ; 30.175,87.87 IC2.8
  Top Layer w0.6: v2(27.3,97.53) 28.47,97.53 30.125,95.875 30.125,94.025 30.125,87.87
  Bottom Layer w0.8: C42.2 v2(27.3,97.53) v2(27.3,98.8) C41.2
pads on no net: IC2.3 IC2.4 IC2.5 IC2.6 IC2.7 IC2.13 IC2.14 IC2.23 IC2.24 IC2.25 IC2.26 IC5.1 IC5.5 IC5.8 IC8.1 IC8.5 IC8.8 IC9.5 IC9.8 J2.3 J2.7 J2.11 J2.15 J2.18 J2.19 J2.23 J2.27 J2.31 J2.34 J2.35 J2.38 J2.39 J2.42 J2.43 J2.46 J2.47 J2.50 J2.51 J2.54 J2.55 J2.58 J2.59 J2.62 J2.63 J2.65 J2.66 U5.1
copper on no net:
  other v3: 0,0 0,0 0,0 60,0

## Polygon pours and split planes (outlines as drawn)
GND on Top Layer "Top Layer-GND" (solid, pour order 0): 0.5,0.5 59.5,0.5 59.5,139.5 0.5,139.5
GND on Bottom Layer "Bottom Layer-GND" (solid, pour order 2): 59.5,0.5 0.5,0.5 0.5,139.5 59.5,139.5
GND on GND (split plane): 59.49,0.51 0.51,0.51 0.51,139.49 59.49,139.49
GND on Supply (split plane): 19.648,35.125 19.653,35.088 19.648,35.05 19.648,0.51 0.51,0.51 0.51,59.648 19.648,59.648
+3.3 on Supply (split plane): 24.748,0.51 20.052,0.51 20.052,34.923 24.748,34.923
-12 on Supply (split plane): 11.198,64.925 11.205,64.873 11.225,64.824 11.257,64.782 11.299,64.75 11.348,64.73 11.4,64.723 15.65,64.723 15.65,63.2 15.657,63.148 15.678,63.099 15.71,63.057 15.751,63.025 15.8,63.005 15.852,62.998 17.1,62.998 17.152,63.005 17.201,63.025 17.243,63.057 17.275,63.099 17.295,63.148 17.302,63.2 17.302,67.173 22.273,67.173 22.273,65.627 19.85,65.627 19.798,65.62 19.749,65.6 19.707,65.568 19.675,65.526 19.655,65.477 19.648,65.425 19.648,60.052 0.51,60.052 0.51,64.723 9.35,64.723 9.402,64.73 9.451,64.75 9.493,64.782 9.525,64.824 9.545,64.873 9.552,64.925 9.552,69.948 11.198,69.948
+12 on Supply (split plane): 59.49,82.927 35.977,82.927 35.977,85.05 35.97,85.102 35.95,85.151 35.918,85.193 35.876,85.225 35.827,85.245 35.775,85.252 27.75,85.252 27.698,85.245 27.649,85.225 27.607,85.193 27.575,85.151 27.555,85.102 27.548,85.05 27.548,82.927 0.51,82.927 0.51,98.023 59.49,98.023
GND on Supply (split plane): 59.49,98.427 0.51,98.427 0.51,139.49 59.49,139.49
+12 on Supply (split plane): 33.348,77.625 33.355,77.573 33.375,77.524 33.407,77.482 33.449,77.45 33.498,77.43 33.55,77.423 59.49,77.423 59.49,65.127 50.902,65.127 50.902,70.125 50.895,70.177 50.875,70.226 50.843,70.268 50.801,70.3 50.752,70.32 50.7,70.327 48.575,70.327 48.523,70.32 48.474,70.3 48.432,70.268 48.4,70.226 48.38,70.177 48.373,70.125 48.373,64.927 38.054,64.927 37.947,65.034 37.947,65.83 37.947,71.2 37.94,71.252 37.92,71.301 37.888,71.343 37.846,71.375 37.797,71.395 37.745,71.402 30.152,71.402 30.152,72.375 30.145,72.427 30.125,72.476 30.093,72.518 30.051,72.55 30.002,72.57 29.95,72.577 28.775,72.577 28.723,72.57 28.674,72.55 28.632,72.518 28.6,72.476 28.58,72.427 28.573,72.375 28.573,71.427 22.55,71.427 22.498,71.42 22.449,71.4 22.407,71.368 22.375,71.326 22.355,71.277 22.348,71.225 22.348,68.1 22.355,68.048 22.375,67.999 22.407,67.957 22.449,67.925 22.498,67.905 22.55,67.898 28.048,67.898 28.048,65.627 22.677,65.627 22.677,67.375 22.67,67.427 22.65,67.476 22.618,67.518 22.576,67.55 22.527,67.57 22.475,67.577 17.1,67.577 17.048,67.57 16.999,67.55 16.957,67.518 16.925,67.476 16.905,67.427 16.898,67.375 16.898,63.402 16.054,63.402 16.054,64.925 16.047,64.977 16.027,65.026 15.995,65.068 15.953,65.1 15.904,65.12 15.852,65.127 11.602,65.127 11.602,70.15 11.595,70.202 11.575,70.251 11.543,70.293 11.501,70.325 11.452,70.345 11.4,70.352 9.35,70.352 9.298,70.345 9.249,70.325 9.207,70.293 9.175,70.251 9.155,70.202 9.148,70.15 9.148,65.127 0.51,65.127 0.51,77.423 26.848,77.423 26.848,73.575 26.855,73.523 26.875,73.474 26.907,73.432 26.949,73.4 26.998,73.38 27.05,73.373 28.625,73.373 28.677,73.38 28.726,73.4 28.768,73.432 28.8,73.474 28.82,73.523 28.827,73.575 28.827,77.6 28.827,82.973 33.348,82.973
-12 on Supply (split plane): 35.573,82.725 35.58,82.673 35.6,82.624 35.632,82.582 35.674,82.55 35.723,82.53 35.775,82.523 59.49,82.523 59.49,77.827 33.752,77.827 33.752,83.175 33.745,83.227 33.725,83.276 33.693,83.318 33.651,83.35 33.602,83.37 33.55,83.377 28.625,83.377 28.573,83.37 28.524,83.35 28.482,83.318 28.45,83.276 28.43,83.227 28.423,83.175 28.423,77.6 28.423,77.55 28.423,73.777 27.252,73.777 27.252,77.625 27.245,77.677 27.225,77.726 27.193,77.768 27.151,77.8 27.102,77.82 27.05,77.827 0.51,77.827 0.51,82.523 27.75,82.523 27.802,82.53 27.851,82.55 27.893,82.582 27.925,82.624 27.945,82.673 27.952,82.725 27.952,84.848 35.573,84.848
GND on Supply (split plane): 34.863,0.51 25.152,0.51 25.152,30.598 34.863,30.598
GND on Supply (split plane): 59.49,0.51 40.577,0.51 40.577,32.098 59.49,32.098
-2 on Supply (split plane): 40.148,33.602 39.125,33.602 39.073,33.595 39.024,33.575 38.982,33.543 38.95,33.501 38.93,33.452 38.923,33.4 38.923,32.3 38.93,32.248 38.95,32.199 38.982,32.157 39.024,32.125 39.073,32.105 39.125,32.098 40.173,32.098 40.173,0.51 35.267,0.51 35.267,30.598 37.825,30.598 37.877,30.605 37.926,30.625 37.968,30.657 38,30.699 38.02,30.748 38.027,30.8 38.027,37.373 39.125,37.373 39.177,37.38 39.226,37.4 39.268,37.432 39.3,37.474 39.32,37.523 39.327,37.575 39.327,38.398 40.148,38.398
GND on Supply (split plane): 59.49,47.302 37.898,47.302 37.947,59.648 59.49,59.648
+2.5 on Supply (split plane): 29.748,71.2 29.755,71.148 29.775,71.099 29.807,71.057 29.849,71.025 29.898,71.005 29.95,70.998 37.543,70.998 37.543,65.83 37.543,59.85 37.544,59.842 37.493,47.101 37.493,47.1 37.497,47.074 37.5,47.049 37.5,47.048 37.51,47.024 37.52,47 37.52,46.999 37.536,46.978 37.552,46.958 37.552,46.957 37.573,46.942 37.593,46.926 37.594,46.926 37.594,46.925 37.618,46.915 37.642,46.905 37.643,46.905 37.669,46.902 37.694,46.898 37.695,46.898 40.848,46.898 40.848,40.352 37.85,40.352 37.798,40.345 37.749,40.325 37.707,40.293 37.675,40.251 37.655,40.202 37.648,40.15 37.648,37.671 37.63,37.627 37.623,37.575 37.623,31.002 25.152,31.002 25.152,35.125 25.145,35.177 25.125,35.226 25.093,35.268 25.051,35.3 25.002,35.32 24.95,35.327 20.052,35.327 20.052,59.85 20.052,65.223 28.25,65.223 28.302,65.23 28.351,65.25 28.393,65.282 28.425,65.324 28.445,65.373 28.452,65.425 28.452,68.1 28.445,68.152 28.425,68.201 28.393,68.243 28.351,68.275 28.302,68.295 28.25,68.302 22.752,68.302 22.752,71.023 28.775,71.023 28.827,71.03 28.876,71.05 28.918,71.082 28.95,71.124 28.97,71.173 28.977,71.225 28.977,72.173 29.748,72.173
+6 on Supply (split plane): 59.49,32.502 39.327,32.502 39.327,33.198 40.35,33.198 40.402,33.205 40.451,33.225 40.493,33.257 40.525,33.299 40.545,33.348 40.552,33.4 40.552,38.6 40.545,38.652 40.525,38.701 40.493,38.743 40.451,38.775 40.402,38.795 40.35,38.802 39.125,38.802 39.073,38.795 39.024,38.775 38.982,38.743 38.95,38.701 38.93,38.652 38.923,38.6 38.923,37.777 38.052,37.777 38.052,39.948 41.05,39.948 41.102,39.955 41.151,39.975 41.193,40.007 41.225,40.049 41.245,40.098 41.252,40.15 41.252,46.898 59.49,46.898
-12 on Supply (split plane): 50.498,64.925 50.505,64.873 50.525,64.824 50.557,64.782 50.599,64.75 50.648,64.73 50.7,64.723 59.49,64.723 59.49,60.052 37.947,60.052 37.947,64.526 37.97,64.523 48.575,64.523 48.627,64.53 48.676,64.55 48.718,64.582 48.75,64.624 48.77,64.673 48.777,64.725 48.777,69.923 50.498,69.923

## Other copper
GND (plane layer: these items are gaps in the copper):
  rectangle: 27.6,76.2 28.6,78.175
  rectangle: 31.41,76.2 32.41,78.175
  rectangle: 30.14,70.8 31.14,72.775
  region: 17.481,64.695 17.481,65.695 15.506,65.695 15.506,64.695
  region: 22.881,64.695 22.881,65.695 20.906,65.695 20.906,64.695
  region: 22.881,63.425 22.881,64.425 20.906,64.425 20.906,63.425
  region: 39.093,64.688 39.093,65.688 37.118,65.688 37.118,64.688
  region: 39.1,63.425 39.1,64.425 37.125,64.425 37.125,63.425
  region: 44.5,63.425 44.5,64.425 42.525,64.425 42.525,63.425
Supply (plane layer: these items are gaps in the copper):
  lines w0.4: 0,59.85 19.85,59.85 ; 0,77.625 27.05,77.625 27.05,73.575 28.625,73.575 28.625,77.6 28.625,77.55 28.625,83.175 33.55,83.175 33.55,77.625 60,77.625 ; 0,82.725 27.75,82.725 27.75,85.05 35.775,85.05 35.775,82.725 60,82.725 ; 0,98.225 60,98.225 ; 0.05,64.925 9.35,64.925 9.35,70.15 11.4,70.15 11.4,64.925 15.852,64.925 15.852,63.2 17.1,63.2 17.1,67.375 22.475,67.375 22.475,65.425 28.25,65.425 28.25,68.1 22.55,68.1 22.55,71.225 27.3,71.225 28.775,71.225 28.775,72.375 29.95,72.375 29.95,71.2 37.745,71.2 37.745,65.83 37.745,59.85 48.2,59.85 49.825,59.85 60,59.85 ; 19.85,0 19.85,35.05 ; 22.775,65.425 19.85,65.425 19.85,59.85 ; 24.95,0 24.95,35.125 19.85,35.125 19.85,59.85 ; 24.975,30.8 35.065,30.8 ; 35.065,0 35.065,30.8 ; 37.77,64.925 37.97,64.725 48.575,64.725 48.575,70.125 50.7,70.125 50.7,64.925 59.95,64.925 ; 38.025,59.85 37.746,59.85 37.695,47.1 60,47.1 ; 40.375,-0.025 40.375,32.275 ; 42.45,47.1 41.05,47.1 41.05,40.15 37.85,40.15 37.85,37.6 37.825,37.575 ; 60,32.3 39.125,32.3 39.125,33.4 40.35,33.4 40.35,38.6 39.125,38.6 39.125,37.575 37.825,37.575 ; 35.065,30.8 37.825,30.8 37.825,37.575

## Silkscreen, mask and mechanical layers (free items; w line width, h text height)
Top Overlay:
  text "GND" at 28.775,101.425 h1
  text "V_CALIB" at 22.25,93.6 h1
  text "GND" at 33.875,93.549 h1
  text "GND" at 19.491,79.374 h1
  text "GND" at 37.819,79.374 h1
  text "+12" at 11.758,71 h1
  text "+12" at 45.759,71 h1
  text "+2.5" at 24.043,70.493 h1 r90
  text "GND" at 26.393,70.493 h1 r90
  text "GND" at 34.568,70.493 h1 r90
  text "+5" at 36.944,70.493 h1 r90
  text "-12" at 11.758,68.625 h1
  text "-12" at 45.759,68.625 h1
  text "+2.5" at 41.35,40.725 h1
  text "GND" at 33.675,34.975 h1
Mechanical 2:
  the board outline again, w0.4
Mechanical 12:
  the board outline again, w0.4

## Dimensions
0,140 to 60,140 on Mechanical 12
0,0 to 0,140 on Mechanical 12

## Text inside footprints (layer, text, board x,y; h text height)
J1: Mechanical 14 "1" at 28.25,133.375 h0.97 r270; Mechanical 14 "2" at 30.787,133.286 h0.97 r270; Mechanical 14 "3" at 31.625,129.125 h0.97 r270; Bottom Overlay "1" at 28.25,133.375 h0.97 r270; Bottom Overlay "2" at 30.787,133.286 h0.97 r270; Bottom Overlay "3" at 31.625,129.125 h0.97 r270